# Altium PCB SpoolBot_drive_PCB.PcbDoc
Units mil, origin at the board's own origin, x right, y up, seen from the top; angles counter-clockwise.
Board outline 3000 x 2000 mil, 2 copper layers (Top Layer, Bottom Layer); 36 components, 36 nets, 161 pads, 71 vias.
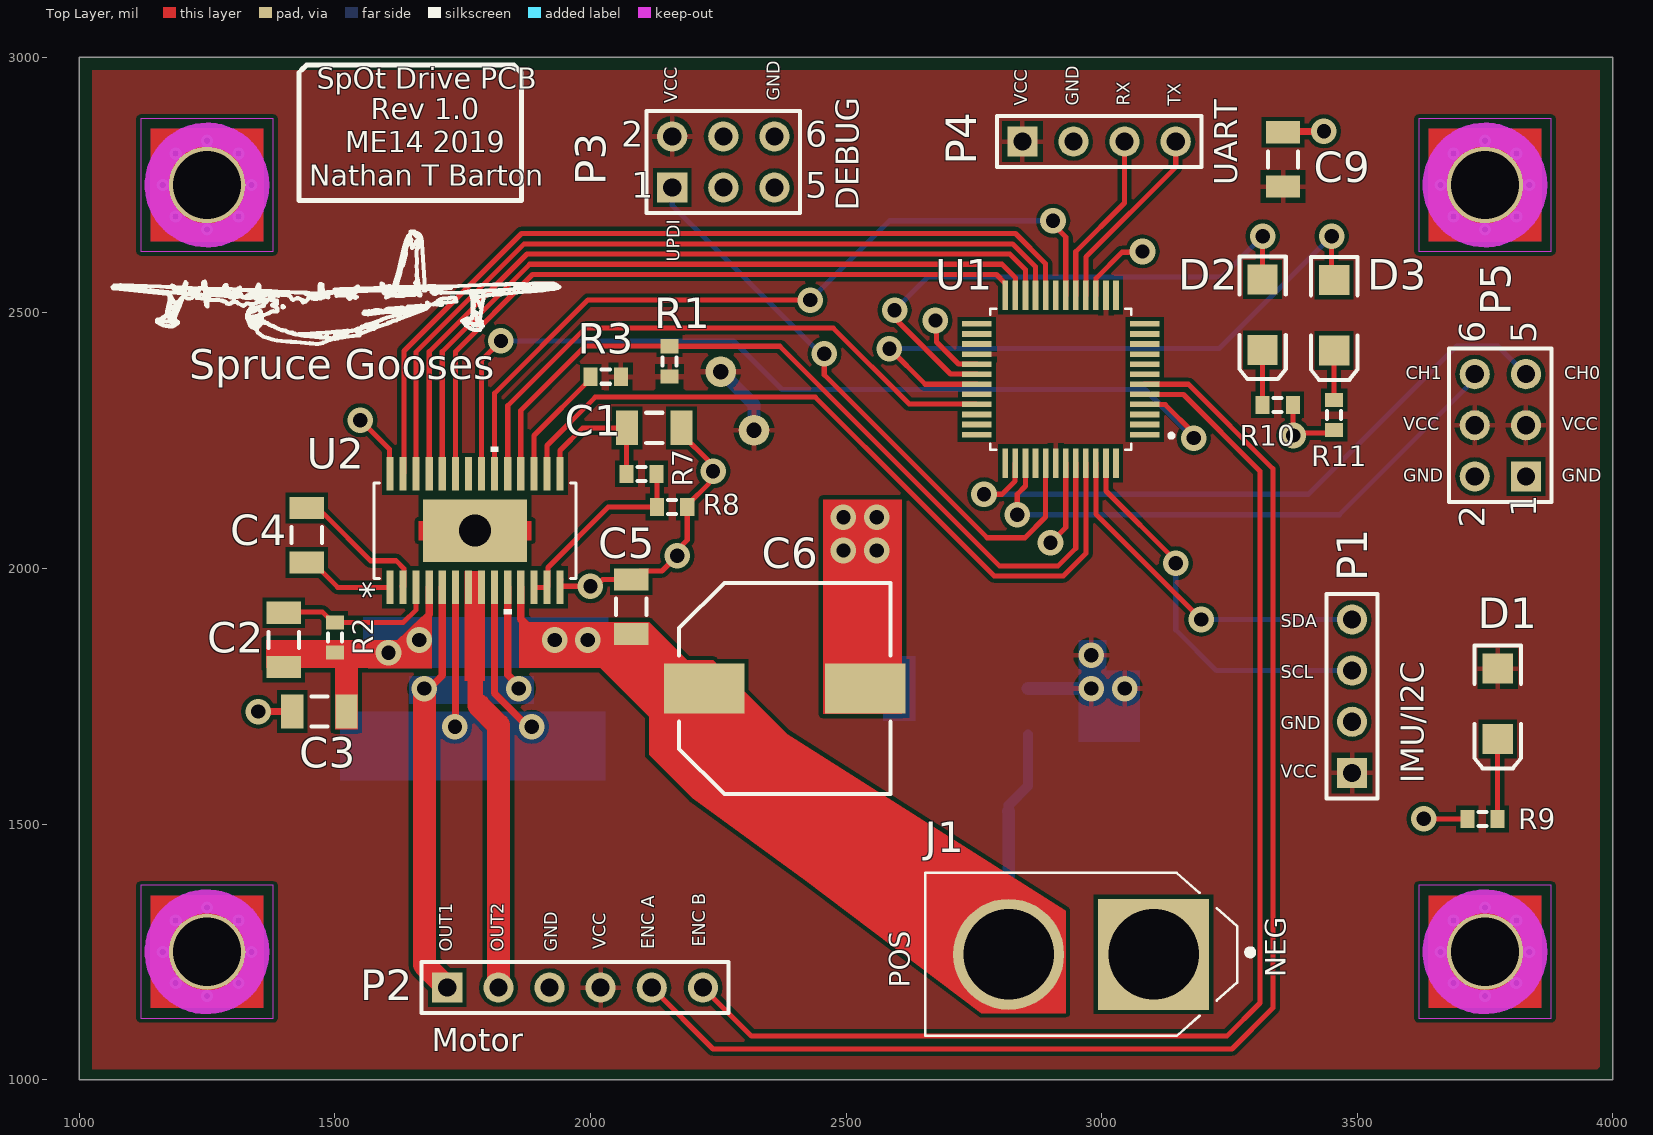
[diagram p0: Top Layer view]
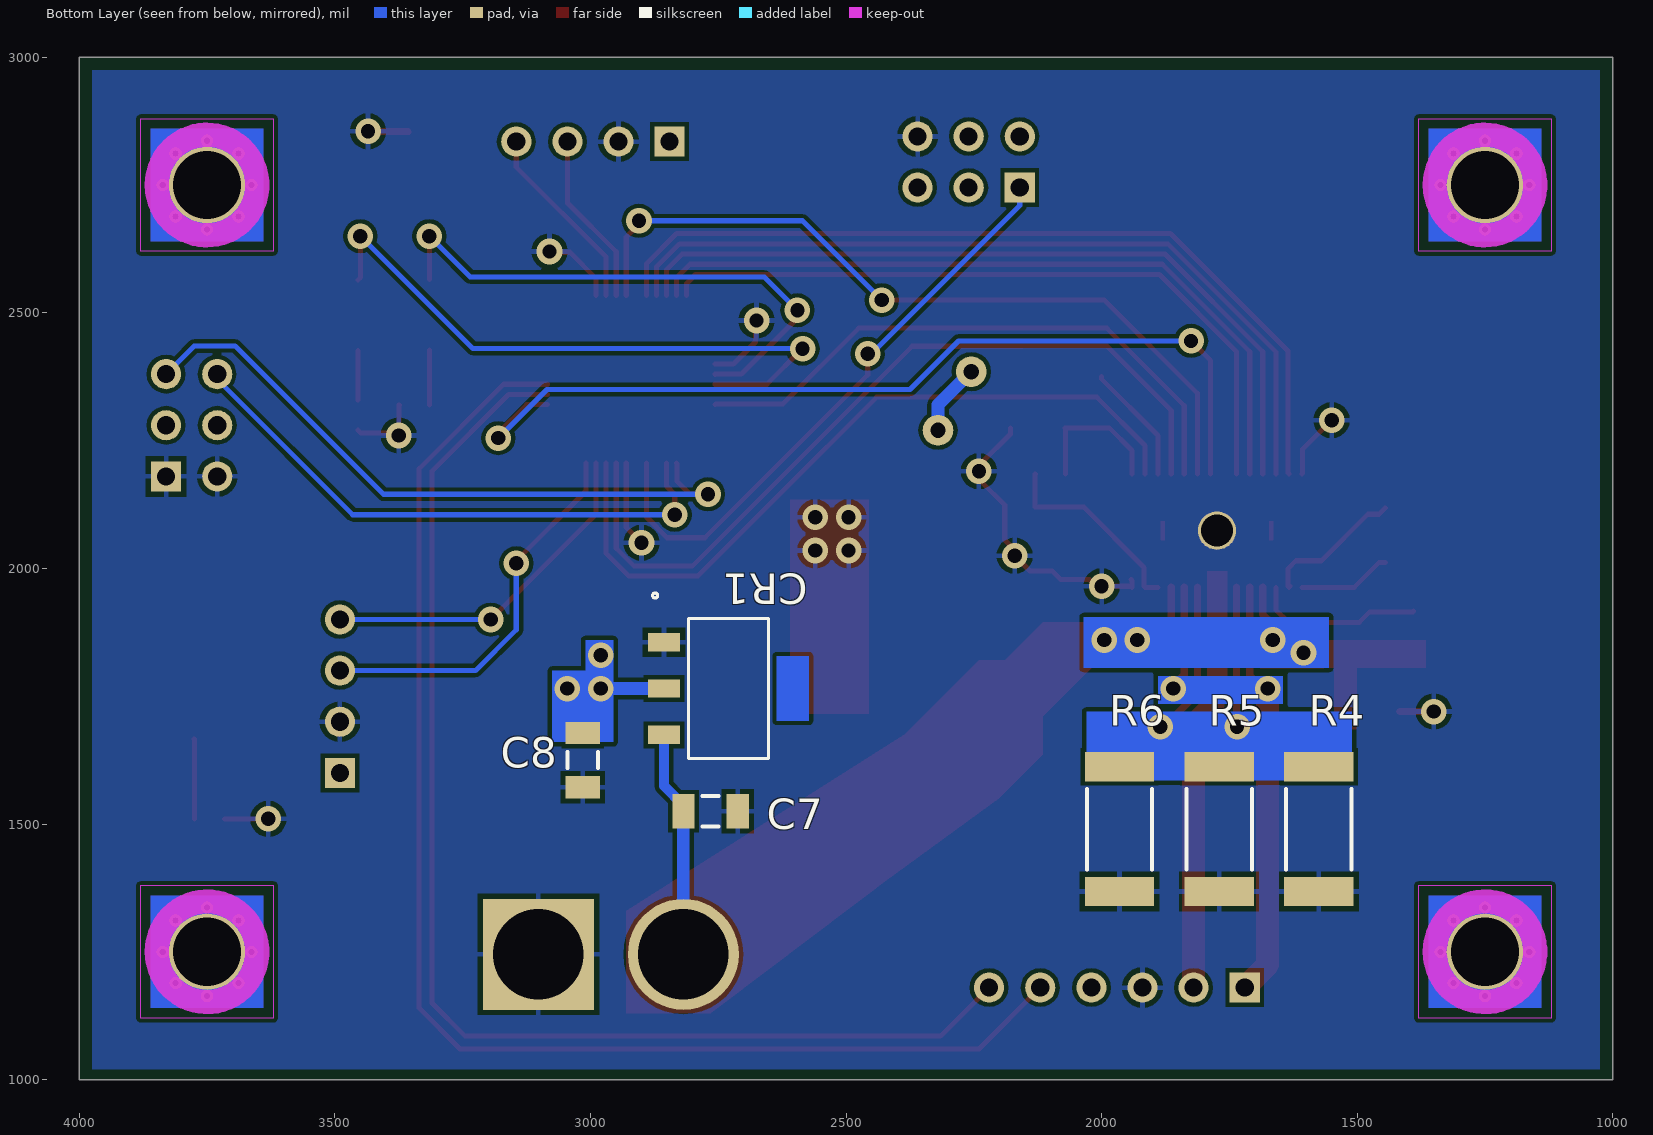
[diagram p1: Bottom Layer view, seen from below]

## Layer stack, top to bottom
Top Solder: solder mask 0.4, Solder Resist, Dk 3.5
Top Layer: signal copper 1.4
Dielectric 1: dielectric 12.6, FR-4, Dk 4.8
Bottom Layer: signal copper 1.4
Bottom Solder: solder mask 0.4, Solder Resist, Dk 3.5

## Board outline
1000,1000 4000,1000 4000,3000 1000,3000

## Design rules (kind name [scope] priority, off if disabled: settings)
Clearance [All] p1: gap=8 ignorepadtopadclearanceinfootprint=FALSE
PolygonConnect PolygonConnect_1 [All vs IsNamedPolygon('Bottom Layer-GND')] p1: thpad.connectstyle=Direct thpad.reliefconductorwidth=10 thpad.reliefentries=4 thpad.polygonreliefangle="90 Angle" thpad.airgapwidth=10 smdpad.connectstyle=Relief smdpad.reliefconductorwidth=10 smdpad.reliefentries=4 smdpad.polygonreliefangle="90 Angle" smdpad.airgapwidth=10 via.connectstyle=Relief via.reliefconductorwidth=10 via.reliefentries=4 via.polygonreliefangle="90 Angle" via.airgapwidth=10
PolygonConnect [All] p2: connectstyle=Relief reliefconductorwidth=10 reliefentries=4 polygonreliefangle="90 Angle" airgapwidth=10
RoutingVias [All] p1: holewidth=28 width=50 viastyle="Through Hole" minholewidth=28 minwidth=50 maxholewidth=28 maxwidth=50
SolderMaskExpansion [All] p1: expansion=4
Width [All] p1: maxlimit=45 minlimit=10 preferedwidth=10 bottomlayer_maxwidth=25 minimp=50.000000 maximp=50.000000 favimp=50.000000
30 further rules are at their usual default settings.

## Classes and differential pairs
component class Power_regulator: C7 C8 CR1 D1 J1 R9
component class MCU_ATmega4809: C9 D2 D3 R10 R11 U1
component class DRV8840_driver: C1 C2 C3 C4 C5 C6 R1 R2 R3 R4 R5 R6 R7 R8 U2
component class Connectors: P1 P2 P3 P4 P5

## Components (designator, comment, footprint, x,y, rotation, side; value= is the part's Value field where it differs from the comment)
C1 "Cap Semi" C1206 2125,2275 r180 top value=0.47uF
C2 "Cap Semi" C1206 1400,1860 r270 top value=0.1uF
C3 "Cap Semi" C1206 1470,1720 r0 top value=0.1uF
C4 "Cap Semi" C1206 1445,2065 r90 top value=0.01uF
C5 "Cap Semi" C1206 2080,1925 r270 top value=0.1uF
C6 "150uF" NIC-CAPA2-10X10_V 2380,1765 r0 top
C7 "Cap Semi" C1206 2765,1525 r0 bottom value=100nF
C8 "Cap Semi" C1206 3015,1625 r90 bottom value=10uF
C9 "Cap Semi" C1206 3355,2800 r270 top value=100nF
CR1 "Part Number: LD1117S50CTR" SOT-223 2730,1765 r270 bottom value=Value
D1 "LED2" 3.2X1.6X1.1 3775,1735 r270 top
D2 "LED2" 3.2X1.6X1.1 3315,2496.1 r270 top
D3 "LED2" 3.2X1.6X1.1 3455,2495 r270 top
J1 "XT60-M" *AMASS_XT60-M 2960,1245 r180 top
MH1 "Mounting-Hole-Altium" Mounting-Hole-Altium 1250,2750 r0 top locked
MH2 "Mounting-Hole-Altium" Mounting-Hole-Altium 3750,2750 r0 top locked
MH3 "Mounting-Hole-Altium" Mounting-Hole-Altium 3750,1250 r0 top locked
MH4 "Mounting-Hole-Altium" Mounting-Hole-Altium 1250,1250 r0 top locked
P1 "Header 4" HDR1X4 3490,1600 r90 top
P2 "Header 6" HDR1X6 1720,1180 r0 top
P3 "Header 3X2" HDR2X3 2160,2745 r0 top
P4 "Header 4" HDR1X4 2845,2835 r0 top
P5 "Header 3X2" HDR2X3 3830,2180 r90 top
R1 "Res3" J1-0603 2155,2405 r270 top value=10K
R2 "Res3" J1-0603 1500,1865 r270 top value=1M
R3 "Res3" J1-0603 2030,2375 r0 top value=0
R4 "0.333R 2512" RESC2512(6432)_M 1575,1490 r90 bottom value="1.00 Ohm"
R5 "0.333R 2512" RESC2512(6432)_M 1770,1490 r90 bottom value="1.00 Ohm"
R6 "0.333R 2512" RESC2512(6432)_M 1965,1490 r90 bottom value="1.00 Ohm"
R7 "Res3" J1-0603 2100,2185 r180 top value=3.3K
R8 "Res3" J1-0603 2160,2120 r180 top value=10K
R9 "Res3" J1-0603 3745,1510 r0 top value=1K
R10 "Res3" J1-0603 3344.53,2320 r180 top value=1K
R11 "Res3" J1-0603 3455,2300 r90 top value=1K
U1 "ATMEGA4809-AFR" *QFP50P900X900X120-48N 2920,2370 r180 top locked
U2 "Part Number: DRV8840PWPR" PWP28_5P18X3P1 1774.25,2074 r90 top locked value=Value

## Footprints (in the part's own frame and the unit in brackets; to place one, negate y for a bottom-side part, rotate by r counter-clockwise, add the part's x,y. Pads: shape width x height; smd on the part's side, far side on the other; paste and mask are expansions set on the pad)
3.2X1.6X1.1 [mm] "SMT LED; 2 Flat Leads"
  rect 1.5x1.5 smd: 1(-1.75,0) 2(1.75,0)
  silkscreen extent -2.9,-1.15 3.2,1.15
*AMASS_XT60-M [mm]
  rect 5.516x5.516 hole 4.5: 1(-3.6,0)
  round 5.516 hole 4.5: 2(3.6,0)
  silkscreen extent -8.55,-4.05 7.75,4.05
*QFP50P900X900X120-48N [mm]
  rect 1.47x0.28 smd: 1(-4.17,2.75) 2(-4.17,2.25) 3(-4.17,1.75) 4(-4.17,1.25) 5(-4.17,0.75) 6(-4.17,0.25) 7(-4.17,-0.25) 8(-4.17,-0.75) 9(-4.17,-1.25) 10(-4.17,-1.75) 11(-4.17,-2.25) 12(-4.17,-2.75) 25(4.17,-2.75) 26(4.17,-2.25) 27(4.17,-1.75) 28(4.17,-1.25) 29(4.17,-0.75) 30(4.17,-0.25) 31(4.17,0.25) 32(4.17,0.75) 33(4.17,1.25) 34(4.17,1.75) 35(4.17,2.25) 36(4.17,2.75)
  rect 0.28x1.47 smd: 13(-2.75,-4.17) 14(-2.25,-4.17) 15(-1.75,-4.17) 16(-1.25,-4.17) 17(-0.75,-4.17) 18(-0.25,-4.17) 19(0.25,-4.17) 20(0.75,-4.17) 21(1.25,-4.17) 22(1.75,-4.17) 23(2.25,-4.17) 24(2.75,-4.17) 37(2.75,4.17) 38(2.25,4.17) 39(1.75,4.17) 40(1.25,4.17) 41(0.75,4.17) 42(0.25,4.17) 43(-0.25,4.17) 44(-0.75,4.17) 45(-1.25,4.17) 46(-1.75,4.17) 47(-2.25,4.17) 48(-2.75,4.17)
  silkscreen extent -5.6,-3.5 3.5,3.5
C1206 [mm] "Chip Capacitor, Body 3.2x1.6mm, IPC High Density"
  rect 1.1x1.7 smd: 1(-1.35,0) 2(1.35,0)
  silkscreen extent -0.4,-0.75 0.4,0.75, body extent -1.7,-0.9 1.7,0.9, height 1.3
HDR1X4 [mm] "Connector; Header; 4 Position"
  rect 1.5x1.5 hole 0.9: 1(0,0)
  round 1.5 hole 0.9: 2(2.54,0) 3(5.08,0) 4(7.62,0)
  silkscreen extent -1.27,-1.27 8.89,1.27
HDR1X6 [mm] "Connector; Header; 6 Position"
  rect 1.5x1.5 hole 0.9: 1(0,0)
  round 1.5 hole 0.9: 2(2.54,0) 3(5.08,0) 4(7.62,0) 5(10.16,0) 6(12.7,0)
  silkscreen extent -1.27,-1.27 13.97,1.27
HDR2X3 [mm] "Connector; Header; 3x2 Position"
  rect 1.5x1.5 hole 0.9: 1(0,0)
  round 1.5 hole 0.9: 2(0,2.54) 3(2.54,0) 4(2.54,2.54) 5(5.08,0) 6(5.08,2.54)
  silkscreen extent -1.27,-1.27 6.35,3.81
J1-0603 [mm] "Chip Resistor, Body 1.6x0.8mm, IPC High Density"
  rect 0.7x0.9 smd: 1(-0.75,0) 2(0.75,0)
  silkscreen extent -0.2,-0.35 0.2,0.35, body extent -0.85,-0.48 0.85,0.48, height 0.9
Mounting-Hole-Altium [mm] "Mounting Hole, Altium, 3.8mm pad, 3.4mm plated hole"
  round 3.8 hole 3.4 mask+0.038: MOUNT(0,0)
  Top Layer circle w1: c0,0 r2.3
  Top Layer region: -2.8,-2.801 2.8,-2.801 2.8,2.799 -2.8,2.799
  Top Layer keep-out region: -3.3,-3.299 3.3,-3.299 3.3,3.301 -3.3,3.301
  Bottom Layer region: -2.8,-2.801 2.8,-2.801 2.8,2.799 -2.8,2.799
  Bottom Layer keep-out region: -3.3,-3.299 3.3,-3.299 3.3,3.301 -3.3,3.301
  Keep-Out Layer circle w1.2: c0,0 r2.5
NIC-CAPA2-10X10_V [mm] "Aluminum Electrolytic Capacitor, Diameter 10mm, Height 10.8mm, Pitch 8mm"
  rect 4x2.5 smd: 1(-4,0) 2(4,0)
  silkscreen extent -5.25,-5.25 5.25,5.25, body extent -4.96,-4.99 5,4.99, height 10.8
PWP28_5P18X3P1 [mil]
  rect 66x14 smd paste+0 mask+0: 1(-111,166.34) 2(-111,140.75) 3(-111,115.16) 4(-111,89.57) 5(-111,63.98) 6(-111,38.39) 7(-111,12.8) 8(-111,-12.8) 9(-111,-38.39) 10(-111,-63.98) 11(-111,-89.57) 12(-111,-115.16) 13(-111,-140.75) 14(-111,-166.34) 15(111,-166.34) 16(111,-140.75) 17(111,-115.16) 18(111,-89.57) 19(111,-63.98) 20(111,-38.39) 21(111,-12.8) 22(111,12.8) 23(111,38.39) 24(111,63.98) 25(111,89.57) 26(111,115.16) 27(111,140.75) 28(111,166.34)
  rect 122.05x203.94 smd paste+0 mask+0: 29(0,0)
  Top Layer region: 18.7,-101.97 -18.7,-101.97 -18.7,-101.97 -18.7,-101.97 -18.7,-109.84 18.7,-109.84 18.7,-101.97 18.7,-101.97
  Top Layer region: 18.7,101.97 -18.7,101.97 -18.7,101.97 -18.7,101.97 -18.7,109.84 18.7,109.84 18.7,101.97 18.7,101.97
  silkscreen extent -164,-198 164,198, body extent 0,0 10,10, height 10
RESC2512(6432)_M [mm] "Chip Resistor, Body 6.4x3.2mm, IPC Low Density"
  rect 1.45x3.45 smd: 1(-3.1,0) 2(3.1,0)
  silkscreen extent -2,-1.63 2,1.63, body extent -3.25,-1.7 3.25,1.7, height 0.75
SOT-223 [mil]
  rect 36x63 smd paste+0 mask+0: 1(-90.55,-126) 2(0,-126) 3(90.55,-126)
  Top Layer region: 63,94.5 63,157.5 -63,157.5 -63,94.5
  silkscreen extent -187,-148 137,78, body extent 0,0 10,10, height 10

## Part data
C1 C2 C3 C4 C5 C7 C8 C9: "Capacitor (Semiconductor SIM Model)", LatestRevisionDate=29-May-2009, LatestRevisionNote="IPC-7351 Footprint Added.", PackageDescription="Chip Capacitor", PackageReference=C1206, Published=8-Jun-2000, Publisher="Altium Limited"
C6: library part CMP-0687-00003-1, "Aluminum Electrolytic Capacitor, UD Series, Low Impedance, 150 uF, 50 V, + / - 20%, -55 to 105 degC, Chip Type, 10 x 10 mm D x L, Pb-Free, Reel", Manufacturer=Nichicon, PartNumber=UUD1H151MNL1GS, Rated Capacitance="150 uF", Rated Ripple Current (at 100kHz)="670 mA", Rated Voltage="50 V", Tolerance Rated Capacitance="-20 to 20%", ComponentLink1Description="Manufacturer URL", ComponentLink1URL=http://www.nichicon.co.jp/, ComponentLink2Description=Datasheet, ComponentLink2URL=http://products.nichicon.co.jp/en/pdf/XJA043/e-ud.pdf, ComponentLink3Description="Package Specification", ComponentLink3URL=http://products.nichicon.co.jp/en/pdf/XJA043/e-ud.pdf, DatasheetVersion=08/2012, Diameter="10 mm", Endurance Time="5000 h", Impedance="0.18 Ohm", Length="10 mm", Mounting Technology="Surface Mount", PackageDescription="2-Pin Surface Mount Device, Diameter 10 mm, Height 10 mm, Pitch 8 mm", PackageReference=CAPAE-D10H10, Packing="Dia382mm Reel", RoHS=TRUE
CR1: library part LD1117S50CTR, "No Description Available", Built_By=EMA_UL_Team, Copyright="Copyright (C) 2018 Accelerated Designs. All rights reserved", Manufacturer_Part_Number=LD1117S50CTR, RefDes=RefDes, Type=DEV, Vendor=STMicroelectronics
D1 D2 D3: "Typical RED, GREEN, YELLOW, AMBER GaAs LED", LatestRevisionDate=17-Jul-2002, LatestRevisionNote="Re-released for DXP Platform.", PackageDescription="SM LED; 2 Flat Leads", PackageReference=3.2X1.6X1.1, PackageVersion=Feb-2002, Published=8-Jun-2000, Publisher="Altium Limited"
J1: Package="Package Analog Devices", Availability=Unavailable, MF=AMASS, MP=XT60-M, Price=None, SnapEDA_Link=https://www.snapeda.com/parts/XT60-M/AMASS/view-part/?ref=snap
MH1 MH2 MH3 MH4: library part CMP-0001-00027-1, "Mounting Hole, Altium, 3.8mm pad, 3.4mm plated hole", ClassName="Mounting Hole", Publisher=Altium
P1 P4: "Header, 4-Pin", LatestRevisionDate=17-Jul-2002, LatestRevisionNote="Re-released for DXP Platform.", Publisher="Altium Limited"
P2: "Header, 6-Pin", LatestRevisionDate=17-Jul-2002, LatestRevisionNote="Re-released for DXP Platform.", Publisher="Altium Limited"
P3 P5: "Header, 3-Pin, Dual row", LatestRevisionDate=17-Jul-2002, LatestRevisionNote="Re-released for DXP Platform.", Publisher="Altium Limited"
R1 R2 R3 R7 R8 R9 R10 R11: "Resistor", LatestRevisionDate=29-May-2009, LatestRevisionNote="IPC-7351 Footprint Added.", PackageDescription="Chip Resistor", PackageReference=J1-0603, Published=8-Jun-2000, Publisher="Altium Limited"
R4 R5 R6: library part CMP-1018-00171-1, "1R 1W 1% 2512 (6432 Metric)  SMD", Case-EIA=2512, Case-Metric=6432, Power="1 W", Tolerance="1 %", Technology=SMT
U1: "20MHz 48KB TQFP48 Ind 125C Green T&R", Package="TQFP-48 Microchip", Availability=Unavailable, MF=Microchip, MP=ATMEGA4809-AFR, Price=None, SnapEDA_Link=https://www.snapeda.com/parts/ATMEGA4809-AFR/Microchip/view-part/?ref=snap
U2: library part DRV8840PWPR, "No Description Available", Manufacturer="Texas Instruments", Built_By=EMA_UL_Team, Copyright="Copyright (C) 2018 Accelerated Designs. All rights reserved", Manufacturer_Part_Number=DRV8840PWPR, RefDes=RefDes, Type=DEV, Vendor="Texas Instruments"

## Free pads (board coordinates)
  round 75 hole 62.5: 2(1774.25,2074)
  round 60 hole 30: 4(2255,2385) 5(2320,2270)

## Via types
v1: diameter 50, hole 28, Top Layer to Bottom Layer, 39 vias
v2: diameter 23.62, hole 11.81, Top Layer to Bottom Layer, 32 vias

## Nets (pads, with @x,y where several pads share a name; then routed paths per layer and width w, separated by ;. In a path a pad name is that pad's centre, name@x,y a point inside that pad or via, vN(x,y) a via of type N, cw(c..) or ccw(c..) an arc to the next point about the centre after c; other vN are vias at no path point)
CH_0: P5.5 U1.38 | length 1309.7
  Top Layer w10: v1(2770,2145) 2805,2145 2830.91,2170.91 2830.91,2205.32 U1.38
  Bottom Layer w10: v1(2770,2145) 3405,2145 3695,2435 3775,2435 P5.5
CH_1: P5.6 U1.39 | length 1122.3
  Top Layer w10: v1(2835,2105) 2835,2145 2851.07,2161.07 U1.39 U1.39
  Bottom Layer w10: v1(2835,2105) 3465,2105 3730,2370 P5.6
DECAY: U1.33 U2.19 | length 1175.5
  Top Layer w10: U2.19 1838.23,2318.23 1990,2470 2475,2470 2623.04,2321.96 2754.65,2321.96 U1.33
ENBL: U1.4 U2.21 | length 1838.4
  Top Layer w10: U2.21 1787.05,2407.05 v1(1825,2445) ; U1.4 3084.68,2320.28 3124.72,2320.28 3180,2265 v1(3180,2255)
  Bottom Layer w10: v1(1825,2445) 2280,2445 2375,2350 3085,2350 v1(3180,2255)
ENC_A: P2.5 U1.6 | length 2672.1
  Top Layer w10: P2.5 2240,1060 3255,1060 3335,1140 3335,2195 3169.84,2360.16 U1.6
ENC_B: P2.6 U1.5 | length 2484.4
  Top Layer w10: P2.6 2315,1085 3245,1085 3310,1150 3310,2190 3160,2340 3084.65,2340 U1.5
GND: C1.1 C3.1 C5.1 C6.2 C7.1 C8.1 C9.1 CR1.1 J1.1 P1.2 P2.3 P3.6 P4.2 P5.1 P5.2 pad.2 R4.1 R5.1 R6.1 R8.1 R9.1 R10.1 R11.1 U1.15 U1.29 U1.43 U2.14 U2.28 U2.29 | length 1536.1
  Top Layer w10: v1(1550,2290) 1607,2233 1607,2185.91 U2.28 ; U2.14@1942.59,1978.15 1940.59,1976.15 U2.14 1942.59,1965 v1(2000,1965) 2010.82,1965 2023.97,1978.15 C5.1 2096.65,1994.8 2139.8,1994.8 v1(2170,2025) 2170,2035.82 2189.53,2055.35 R8.1 2189.53,2123.94 2232.35,2166.76 2232.35,2182.35 v1(2240,2190) 2232.35,2197.65 2232.35,2208.99 2178.15,2263.19 C1.1 ; v1(2675,2485) 2677.21,2482.79 2677.21,2442.79 2719.96,2400.04 2755.32,2400.04 U1.29 ; v1(2900,2050) 2929.84,2079.84 U1.43 U1.43@2929.92,2205.91 ; U1.15 2989.41,2534.69 2989.41,2567.83 3040,2618.42 3078.42,2618.42 v1(3080,2620) ; C9.1 C9.1@3356.85,2855 ; R10.1 3374.53,2319.53 3374.53,2260.47 3379.29,2265.24 3449.76,2265.24 R11.1 ; v1(3630,1510) R9.1
  Top Layer w14: v1(1350,1720) C3.1 ; C9.1@3356.85,2855 v1(3435,2855)
  other v1: 2495,2035 2560,2035 2495,2100 2560,2100 3375,2260
I0: U1.24 U2.23 | length 1408.1
  Top Layer w10: U2.23 1735.86,2424.04 1886.82,2575 2794.33,2575 2811.73,2557.6 U1.24
I1: U1.23 U2.24 | length 1476.3
  Top Layer w10: U2.24 1710.27,2423.9 1881.37,2595 2805,2595 2831.42,2568.58 U1.23
I2: U1.22 U2.25 | length 1547.3
  Top Layer w10: U2.25 1684.68,2423.77 1875.91,2615 2820.46,2615 2851.1,2584.35 U1.22
I3: U1.21 U2.26 | length 1612.4
  Top Layer w10: U2.26 1659.09,2423.63 1870.46,2635 2825.91,2635 2870.79,2590.12 U1.21
I4: U1.20 U2.27 | length 1677.6
  Top Layer w10: U2.27 1635.5,2187 1635.5,2425.5 1865,2655 2831.37,2655 2890.47,2595.89 U1.20
NetC2_1: C2.1 R2.1 U2.3 | length 332.2
  Top Layer w10: C2.1@1390,1916.3 1391.3,1915 1475.59,1915 1496.06,1894.53 R2.1 1634.53,1894.53 1659.09,1919.09 U2.3
NetC4_1: C4.1 U2.1 | length 183.1
  Top Layer w10: C4.1 1456.81,2011.85 1505.66,1963 U2.1
NetC4_2: C4.2 U2.2 | length 279.4
  Top Layer w10: C4.2 1457.29,2105.86 1479.14,2105.86 1570,2015 1620,2015 1635,2000 1635,1964.5 U2.2 U2.2@1631.5,1965
NetD1_2: D1.2 R9.2 | length 156.3
  Top Layer w10: R9.2 3774.53,1665.63 D1.2
NetD2_1: D2.1 U1.30 | length 1086.5
  Top Layer w10: v1(2595,2505) 2595,2490 2704.65,2380.35 2755.32,2380.35 U1.30 ; D2.1 v1(3315,2650)
  Bottom Layer w10: v1(2595,2505) 2660,2570 3235,2570 v1(3315,2650)
NetD2_2: D2.2 R10.2 | length 107.2
  Top Layer w10: R10.2 D2.2
NetD3_1: D3.1 U1.31 | length 1244.1
  Top Layer w10: v1(2585,2430) 2654.84,2360.16 U1.31 ; v1(3450,2650) 3450,2568.9 D3.1
  Bottom Layer w10: v1(2585,2430) 3230,2430 v1(3450,2650)
NetD3_2: D3.2 R11.2 | length 96.6
  Top Layer w10: R11.2 D3.2
NetR3_1: R3.1 U2.17 | length 236
  Top Layer w10: U2.17 1889.41,2260 2000.47,2371.06 R3.1
NetR4_2: R4.2 R5.2 R6.2 U2.6 U2.9 | length 580.2
  Top Layer w14: v1(1735,1690) 1735.86,1690.86 U2.6 ; U2.9 1812.64,1755.8 1878.43,1690 v1(1885,1690)
NetR7_1: R7.1 R8.2 U2.12 U2.13 | length 393.2
  Top Layer w10: U2.12 U2.13 1917,1965 1917,2002 2035,2120 R8.2 2130,2120.47 2130,2184.53 R7.1
NFAULT: R1.1 U1.44 U2.18 | length 1620.5
  Top Layer w10: U2.18 1863.82,2308.82 1990,2435 2154.53,2435 R1.1 2370.47,2434.53 2800,2005 2915,2005 2949.53,2039.53 U1.44
NRESET: U1.45 U2.16 | length 1488.7
  Top Layer w10: U2.16 1915,2240.46 2009.54,2335 2440,2335 2632.5,2142.5 2790,1985 2925,1985 2969.21,2029.21 U1.45
OUT1: P2.1 U2.5 U2.10 | length 1029.1
  Top Layer w14: v1(1675,1765) 1684.74,1765 1710.01,1790.27 1710.27,1790.27 U2.5 ; U2.10 1838.23,1791.77 1860,1770 v1(1860,1765)
  Top Layer w45: v1(1675,1765) 1675,1225 P2.1
OUT2: P2.2 U2.7 U2.8 | length 628.6
  Top Layer w10: 1775,1738.49 1781.74,1731.74
  Top Layer w30: 1775,1738.49 1775,1790
  Top Layer w45: 1781.74,1731.74 1820,1693.49 P2.2
PHASE: U1.18 U2.20 | length 1545.9
  Top Layer w10: U2.20 1812.64,2342.64 1995,2525 v1(2430,2525) ; v1(2905,2680) 2905,2673.12 2929.84,2648.27 U1.18
  Bottom Layer w10: v1(2430,2525) 2585,2680 v1(2905,2680)
SCL: P1.3 U1.47 | length 760.5
  Top Layer w10: U1.47 3008.58,2151.42 3145,2015 v1(3145,2010)
  Bottom Layer w10: v1(3145,2010) 3145,1880 3225,1800 P1.3
SDA: P1.4 U1.46 | length 686.2
  Top Layer w10: U1.46 2988.9,2106.1 v1(3195,1900)
  Bottom Layer w10: v1(3195,1900) P1.4
SERIAL1_RXD: P4.3 U1.17 | length 340.4
  Top Layer w10: U1.17 2949.53,2619.53 3045,2715 P4.3
SERIAL1_TXD: P4.4 U1.16 | length 373.6
  Top Layer w10: U1.16 2969.21,2609.21 3145,2785 P4.4
UPDI: P3.1 U1.41 | length 1181
  Top Layer w10: v1(2457.5,2420) 2457.5,2378.76 2776.26,2060 2850,2060 2890.47,2100.47 U1.41
  Bottom Layer w10: P3.1 2160,2710 2450,2420 v1(2457.5,2420)
VBATT: C2.2 C3.2 C5.2 C6.1 C7.2 CR1.3 J1.2 R2.2 U2.4 U2.11 | length 633.1
  Top Layer w14: 1660,1885 1684.68,1909.68 U2.4 ; 1863.82,1901.18 U2.11 ; 1880,1870 1880,1885
  Top Layer w15: 1863.82,1901.18 1880,1885
  Bottom Layer w10: C7.2 C7.2@2818.15,1536.81
  Bottom Layer w20: C7.2@2818.15,1536.81 2856,1574.66 CR1.3
  Bottom Layer w25: C7.2 2818.27,1524.88 J1.2
  other v1: 1605,1835 1665,1860 1930,1860 1995,1860
VCC: C8.2 C9.2 CR1.2 D1.1 P1.1 P2.4 P3.2 P4.1 P5.3 P5.4 pad.4 pad.5 R1.2 R3.2 U1.14 U1.28 U1.42 | length 330.9
  Bottom Layer w10: v1(2980,1765) v1(3045,1765)
  Bottom Layer w25: pad.4 2320,2320 pad.5 ; CR1.2 v1(2980,1765)
  other v1: 2980,1830
VMREF: C1.2 R7.2 U2.15 | length 285.8
  Top Layer w10: U2.15 1940.59,2230.59 1985,2275 C1.2 2070.47,2273.62 R7.2
pads on no net: MH1.MOUNT MH2.MOUNT MH3.MOUNT MH4.MOUNT P3.3 P3.4 P3.5 U1.1 U1.2 U1.3 U1.7 U1.8 U1.9 U1.10 U1.11 U1.12 U1.13 U1.19 U1.25 U1.26 U1.27 U1.32 U1.34 U1.35 U1.36 U1.37 U1.40 U1.48 U2.22
copper on no net:
  other v2: 1250,1163.39 3750,1163.39 1188.75,1188.75 1311.25,1188.75 3688.75,1188.75 3811.25,1188.75 1163.39,1250 1336.61,1250 3663.39,1250 3836.61,1250 1188.75,1311.25 1311.25,1311.25 3688.75,1311.25 3811.25,1311.25 1250,1336.61 3750,1336.61 1250,2663.39 3750,2663.39 1188.75,2688.75 1311.25,2688.75 3688.75,2688.75 3811.25,2688.75 1163.39,2750 1336.61,2750 3663.39,2750 3836.61,2750 1188.75,2811.25 1311.25,2811.25 3688.75,2811.25 3811.25,2811.25 1250,2836.61 3750,2836.61

## Polygon pours and split planes (outlines as drawn)
VCC on Top Layer "Top Layer-No Net" (solid, pour order 4): 1025,2975 3975,2975 3975,1025 3970,1020 1025,1020
GND on Bottom Layer "Bottom Layer-GND" (solid, pour order 8): 1940,1945 1945,1950 1945,2215 1590,2215 1590,1945
GND on Bottom Layer "Bottom Layer-No Net" (solid, pour order 6): 1025,2975 3975,2975 3975,1020 1025,1020

## Other copper
Top Layer:
  rectangle net OUT2: 1754,1780 1794,1995
  rectangle net VBATT: 1500,1685 1545,1815
  rectangle net VBATT: 1365,1805 1635,1860
  rectangle net VBATT: 1860,1805 2115,1895
  rectangle net GND: 2455,1715 2610,2135
  region net VBATT: 1635,1805 1690,1805 1690,1905 1670,1905 1565,1805
  region net VBATT: 2005,1820 2115,1710 2215,1710 2215,1795 2115,1895
  region net VBATT: 2397.5,1662.5 2240,1820 2115,1820 2115,1635 2200,1550
  region net VBATT: 2420,1390 2765,1130 2930,1130 2930,1330 2382.5,1677.5 2200,1550
Bottom Layer:
  rectangle net VCC: 2955,1790 3010,1860
  rectangle net VCC: 2955,1660 3075,1800
  rectangle net NetR4_2: 1510,1585 2030,1720
  rectangle net OUT1: 1645,1735 1890,1790
  rectangle net VBATT: 1555,1805 2035,1905

## Silkscreen, mask and mechanical layers (free items; w line width, h text height)
Top Overlay:
  drawing of 3022 lines, arcs and shapes, not listed
  text "SpOt Drive PCB" at 1465,2925 h70
  text "GND" at 2370,2915 h25 r90
  text "VCC" at 2170,2910 h25 r90
  text "VCC" at 2855,2905 h25 r90
  text "GND" at 2955,2905 h25 r90
  text "RX" at 3055,2905 h25 r90
  text "TX" at 3155,2905 h25 r90
  text "Rev 1.0" at 1570,2865 h70
  text "ME14 2019" at 1520,2800 h70
  text "UART" at 3265,2750 h45 r90
  text "Nathan T Barton" at 1450,2735 h70
  text "DEBUG" at 2525,2700 h45 r90
  text "UPDI" at 2175,2600 h25 r90
  text "CH1" at 3595,2370 h25
  text "CH0" at 3905,2370 h25
  text "Spruce Gooses" at 1215,2350 h100
  text "VCC" at 3590,2270 h25
  text "VCC" at 3900,2270 h25
  text "GND" at 3590,2170 h25
  text "GND" at 3900,2170 h25
  text "SDA" at 3350,1885 h25
  text "SCL" at 3350,1785 h25
  text "GND" at 3350,1685 h25
  text "VCC" at 3350,1590 h25
  text "IMU/I2C" at 3630,1580 h45 r90
  text "ENC B" at 2225,1260 h25 r90
  text "VCC" at 2030,1255 h25 r90
  text "ENC A" at 2125,1255 h25 r90
  text "OUT1" at 1730,1250 h25 r90
  text "OUT2" at 1830,1250 h25 r90
  text "GND" at 1935,1250 h25 r90
  text "NEG" at 3360,1200 h40 r90
  text "POS" at 2625,1180 h40 r90
  text "Motor" at 1690,1055 h45
Mechanical 2:
  the board outline again, w10

## Text inside footprints (layer, text, board x,y; h text height)
CR1: Mechanical 7 "Default Pin Padstyle: RX36Y63D0T" at 3187.5,2165 h50 r90; Mechanical 7 "Alt 1 Padstyle: OX60Y90D30P" at 3237.5,2102.5 h50 r90; Mechanical 7 "Alt 2 Padstyle: OX90Y60D30P" at 3287.5,2102.5 h50 r90; Mechanical 7 "0.287in/7.29mm" at 2742.5,1463 h25 r90; Mechanical 7 "0.035in/0.889mm" at 2616.5,1538 h25 r90; Mechanical 7 "0.091in/2.3mm" at 3068.5,1891.53 h25 r90; Mechanical 7 "0.034in/0.864mm" at 2968.5,1949.3 h25 r90; Mechanical 7 "0.264in/6.706mm" at 2466.5,1858.75 h25 r90; Mechanical 7 "0.146in/3.708mm" at 2742.5,2204.5 h25 r90
P3: Top Overlay "1" at 2080,2725 h50; Top Overlay "2" at 2060,2825 h50; Top Overlay "5" at 2420,2725 h50; Top Overlay "6" at 2420,2825 h50
P5: Top Overlay "1" at 3850,2100 h50 r90; Top Overlay "2" at 3750,2080 h50 r90; Top Overlay "5" at 3850,2440 h50 r90; Top Overlay "6" at 3750,2440 h50 r90
U2: Top Overlay "*" at 1598.91,1940.5 h50 r90; Mechanical 7 "0.03in/0.762mm" at 2087.16,1875.5 h25 r90; Mechanical 7 "0.026in/0.65mm" at 1633.2,1668 h25 r90; Mechanical 7 "0.386in/9.8mm" at 1786.75,2282.5 h25 r90; Mechanical 7 "0.26in/6.604mm" at 1411.34,1986.5 h25 r90; Mechanical 7 "0.177in/4.496mm" at 1486.34,1980.25 h25 r90; Mechanical 7 "Alt 2 Padstyle: OX90Y60D30P" at 2467.16,1736.5 h50 r90; Mechanical 7 "Alt 1 Padstyle: OX60Y90D30P" at 2407.16,1736.5 h50 r90; Mechanical 7 "Heat Tab Padstyle: RX122p05Y203p94D0T" at 2287.16,1611.5 h50 r90; Mechanical 7 "Pin One Padstyle: RX66Y14D0T" at 2227.16,1724 h50 r90; Mechanical 7 "Default Padstyle: RX66Y14D0T" at 2167.16,1724 h50 r90; Mechanical 13 "*" at 1643.91,1983 h50 r90